# Altium PCB pedal_pcb.PcbDoc
Units mil, origin at the board's own origin, x right, y up, seen from the top; angles counter-clockwise.
Board outline 6000 x 4000 mil, 2 copper layers (Top Layer, Bottom Layer); 23 components, 18 nets, 75 pads, 0 vias.
Unrouted connection lines stored in the file: 54.
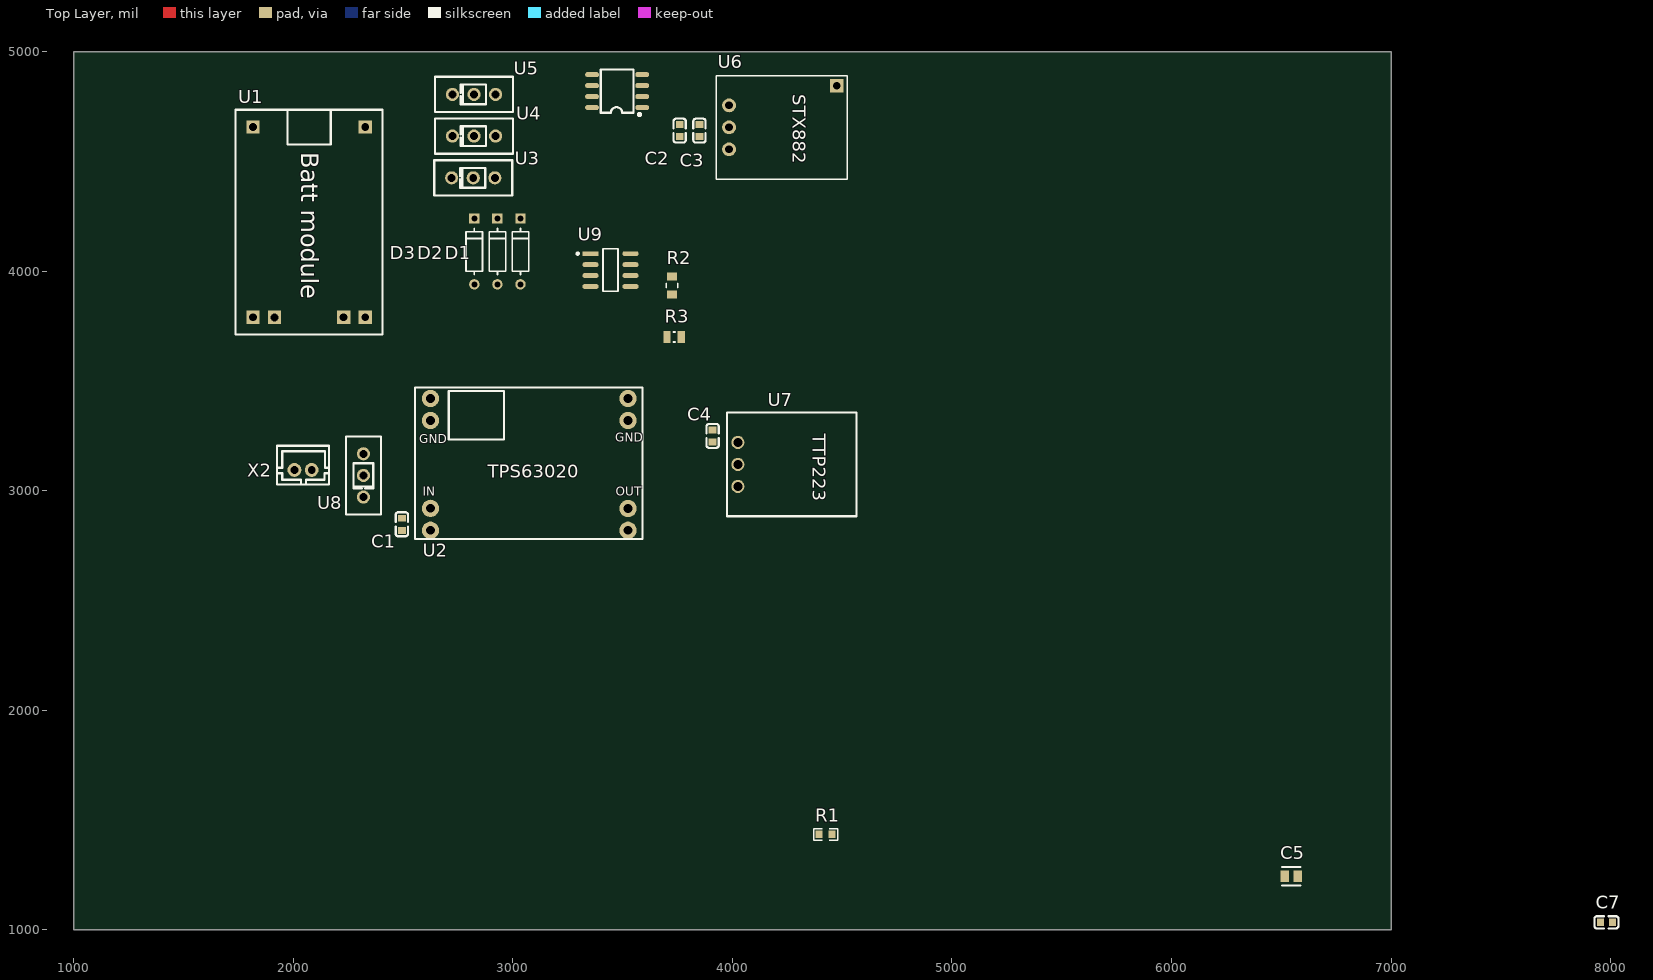
[diagram p0: Top Layer view]
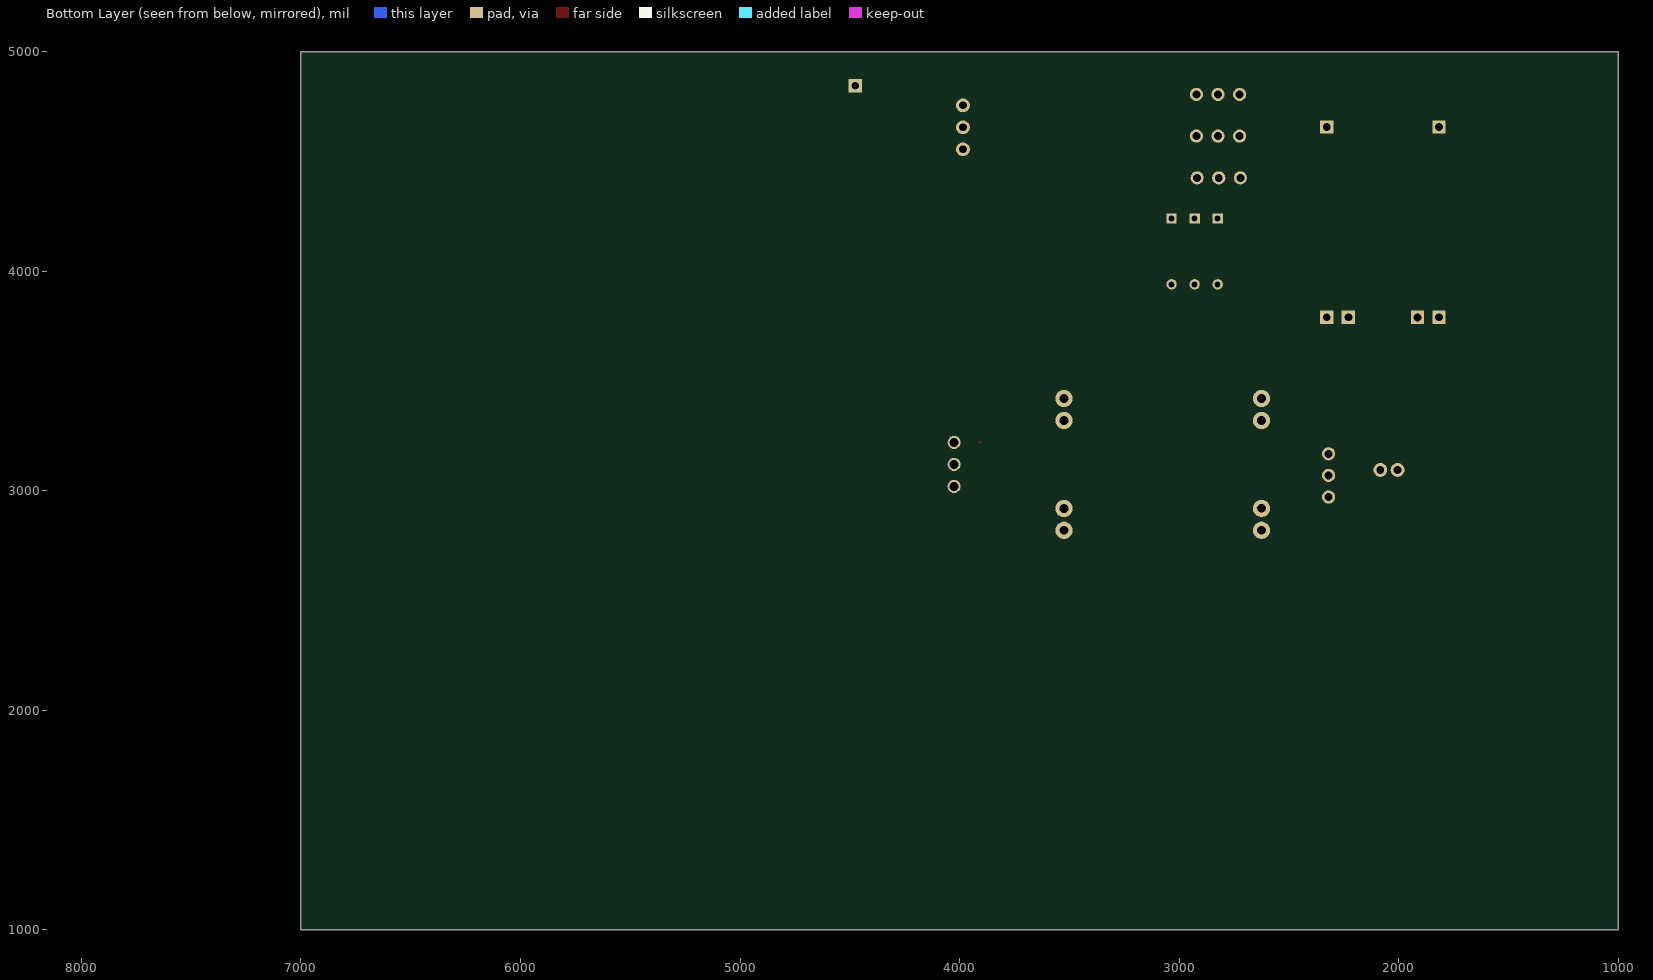
[diagram p1: Bottom Layer view, seen from below]

## Layer stack, top to bottom
Top Solder: solder mask 0.4, Solder Resist, Dk 3.5
Top Layer: signal copper 1.4
Dielectric 1: dielectric 12.6, FR-4, Dk 4.8
Bottom Layer: signal copper 1.4
Bottom Solder: solder mask 0.4, Solder Resist, Dk 3.5

## Board outline
1000,1000 7000,1000 7000,5000 1000,5000

## Design rules (kind name [scope] priority, off if disabled: settings)
Clearance [All] p1: gap=10 ignorepadtopadclearanceinfootprint=FALSE
PolygonConnect [All] p1: connectstyle=Relief reliefconductorwidth=10 reliefentries=4 polygonreliefangle="90 Angle" airgapwidth=10
RoutingVias [All] p1: holewidth=28 width=50 viastyle="Through Hole" minholewidth=28 minwidth=50 maxholewidth=28 maxwidth=50
SolderMaskExpansion [All] p1: expansion=0 istentingtop=FALSE
SupplyNets "Schematic Supply Nets_1" [InNet('GND')] p1: voltage=0.000
SupplyNets "Schematic Supply Nets" [InNet('VCC')] p2: voltage=0.000
Width [All] p1: maxlimit=10 minlimit=10 preferedwidth=10
30 further rules are at their usual default settings.

## Classes and differential pairs
component class dropout_timer: C5 C7 R2 R3 U9

## Components (designator, comment, footprint, x,y, rotation, side; value= is the part's Value field where it differs from the comment)
C1 "10uF" C0603 2495,2847.4 r270 top
C2 "10uF" C0603 3760,4640 r270 top
C3 "100nF" C0603 3850,4640 r270 top
C4 "100nF" C0603 3910,3250 r90 top
C5 "C0805C103K5RACTU" FP-C0805C-DN-MFG 6544.53,1245 r0 top value="10,000 pF"
C7 "10uF" C0603 7980,1035 r0 top
D1 "1N4148" FP-017AG-MFG 3035,4090 r270 top
D2 "1N4148" FP-017AG-MFG 2930,4090 r270 top
D3 "1N4148" FP-017AG-MFG 2825,4090 r270 top
R1 "330k" R0603 4425,1435 r0 top
R2 "AC0805FR-0747RL" FP-AC0805-MFG 3725,3935 r90 top value=47Ω
R3 "CRCW080510K0JNTA" RESC2013X50X30LL20T20 3735,3700 r180 top
U1 "TP4056" BATTMODULE 1737.9,4734.9 r270 top
U2 "TPS63020 Module1" "TPS63020 MODULE AIOT" 2555,3470 r0 top
U3 "SS-12D00-G3" SW-TH_3P-L8.8-W3.9-P2.50_SS12D00G3 2820,4425 r0 top
U4 "SS-12D00-G3" SW-TH_3P-L8.8-W3.9-P2.50_SS12D00G3 2823.4,4615 r0 top
U5 "SS-12D00-G3" SW-TH_3P-L8.8-W3.9-P2.50_SS12D00G3 2823.4,4805 r0 top
U6 "STX882-433" STX882_NiceRF_12x15.2 4225,4655 r270 top
U7 "TTP223" TTP223 4290,3120 r270 top
U8 "SS-12D00-G3" SW-TH_3P-L8.8-W3.9-P2.50_SS12D00G3 2320,3070 r90 top
U9 "TLC555QDR" FP-D0008A-IPC_C 3445,4005 r0 top
X2 "B2B-PH-K-S" CONN-TH_B2B-PH-K-S 2045,3095 r0 top
? "EV1527" SOP-8_L4.9-W3.9-P1.27-LS6.0-TL 3475,4820 r180 top

## Footprints (in the part's own frame and the unit in brackets; to place one, negate y for a bottom-side part, rotate by r counter-clockwise, add the part's x,y. Pads: shape width x height; smd on the part's side, far side on the other; paste and mask are expansions set on the pad)
BATTMODULE [mil]
  rect 60x60 hole 36 paste-99999 mask+4: 1(78.8,590.5) 2(78.8,78.7) 3(944.9,590.5) 4(944.9,492.1) 5(945,177.1) 6(944.9,78.7)
  silkscreen extent 0,0 1024,669
C0603 [mil]
  rect 31.5x35.4 smd: 1(-27.6,0) 2(27.5,0)
  silkscreen extent -55,-28 55,28
CONN-TH_B2B-PH-K-S [mil]
  round 63 hole 35.4: 1(39.4,0) 2(-39.4,0)
  silkscreen extent -118,-67 118,110
FP-017AG-MFG [mm]
  rect 1.2x1.2 hole 0.7 paste-2539.97 mask+0: 1(-3.813,0)
  round 1.2 hole 0.7 paste-2539.97 mask+0: 2(3.813,0)
  silkscreen extent -2.68,-0.95 2.68,0.95, body extent -4.51,-1.05 4.51,1.05, height 0.25
FP-AC0805-MFG [mm]
  rect 0.9x1.2 smd paste+0 mask+0: 1(-1.05,0) 2(1.05,0)
  silkscreen extent -0.23,-0.67 0.23,0.67, body extent -1.6,-0.77 1.6,0.77, height 0.25
FP-C0805C-DN-MFG [mm]
  rect 0.95x1.35 smd paste+0 mask+0: 1(-0.75,0) 2(0.75,0)
  silkscreen extent -1.1,-1.07 1.1,1.07, body extent -1.4,-0.85 1.4,0.85, height 0.25
FP-D0008A-IPC_C [mil]
  rect 73.59x21.34 smd paste+0 mask+0: 1(-91.09,75)
  rrect100% 73.59x21.34 smd paste+0 mask+0: 2(-91.09,25) 3(-91.09,-25) 4(-91.09,-75) 5(91.09,-75) 6(91.09,-25) 7(91.09,25) 8(91.09,75)
  silkscreen extent -154,-97 35,97, body extent -132,-100 132,100, height 10
R0603 [mil]
  rect 31.8x34 smd paste-3937 mask+2: 1(-29.6,0) 2(29.7,0)
  silkscreen extent -54,-26 54,26
RESC2013X50X30LL20T20 [mm] "Chip Resistor, 2-Leads, Body 2.00x1.25mm, IPC High Density"
  rect 0.85x1.35 smd: 1(-0.825,0) 2(0.825,0)
  silkscreen extent -0.1,-0.58 0.1,0.58, body extent -1.1,-0.72 1.1,0.72, height 0.5
SOP-8_L4.9-W3.9-P1.27-LS6.0-TL [mil]
  oval 63x23.6 smd: 1(-114.2,75) 2(-114.2,25) 3(-114.2,-25) 4(-114.2,-75) 5(114.2,-75) 6(114.2,-25) 7(114.2,25) 8(114.2,75)
  silkscreen extent -108,-98 75,112
STX882_NiceRF_12x15.2 [mil]
  rect 63x63 hole 35: 1(-189,250)
  round 63 hole 35: 2(-100,-240) 3(0,-240) 4(100,-240)
  silkscreen extent -236,-299 236,299
SW-TH_3P-L8.8-W3.9-P2.50_SS12D00G3 [mil]
  round 60 hole 36 paste-99999 mask+2: 1(-98.4,0) 2(0,0) 3(98.4,0)
  silkscreen extent -178,-80 178,80
"TPS63020 MODULE AIOT" [mil]
  round 78.7 hole 39.4: 1(70,-150) 1(70,-50) 2(70,-650) 2(70,-550) 3(970,-150) 3(970,-50) 4(970,-650) 4(970,-551)
  silkscreen extent 0,-689 1036,0
TTP223 [mil]
  round 60 hole 40.2: 1(-100,-265) 2(0,-265) 3(100,-265)
  silkscreen extent -236,-315 236,276

## Part data
C1 C2 C7: library part CAP_0603, AddInBom=yes, ConvertToPcb=yes, Device=CAP_0603, FootprintName=C0603, ModelId=624118aa3cc7497086c383c2d72e0852ÂŽ0819f05c4eef4c71ace90d822a990e87, ModelName=C0603_L1.6-W0.8-H0.8, ModelTransform=62.992,31.496,0,0,0,0,0,0,0, Supplier Footprint=0603, Symbol=CAP_OLD
C3 C4: library part CAP_0603_1, AddInBom=yes, ConvertToPcb=yes, Device=CAP_0603, FootprintName=C0603, ModelId=624118aa3cc7497086c383c2d72e0852ÂŽ0819f05c4eef4c71ace90d822a990e87, ModelName=C0603_L1.6-W0.8-H0.8, ModelTransform=62.992,31.496,0,0,0,0,0,0,0, Supplier Footprint=0603, Symbol=CAP_OLD
C5: library part CMP-2007-01079-2, "CAP CER 10000PF 50V X7R 0805", Capacitance="10,000 pF", Manufacturer=KEMET, Package=C0805C-DN, Temperature="-55°C to +125°C", Temperature Characteristic=X7R, Temperature Coefficient=30ppm/°C, Temperature Range High=+125°C, Temperature Range Low=-55°C, Tolerance=0.1, Voltage Rating="50 V", Automotive=No, Category=Cap, ComponentLink2Description=Datasheet, ComponentLink2URL=https://content.kemet.com/datasheets/KEM_C1003_C0G_SMD.pdf, Device Class L1="Passive Components", Device Class L2=Capacitors, Device Class L3="Ceramic Capacitors", Digikey Description="CAP CER 10000PF 50V X7R 0805", Height=0.88mm, Ipc Land Pattern Name=CAPC200125X78, Lead Free=Yes, Manufacturer Part Number=C0805C103K5RACTU, Material=Ceramic, Octopart=https://octopart.com/c0805c103k5ractu-kemet-90536, RoHS=TRUE
D1 D2 D3: library part CMP-07163-000046-1, "DIODE GEN PURP 100V 200MA DO35", Average Rectified Current=200mA, Capacitance=4pF, Case/Package=DO-35, Current=4A, Forward Current=300mA, Forward Voltage=1V, Max Forward Surge Current (Ifsm)=1A, Max Operating Temperature=175°C, Max Power Dissipation=500mW, Max Repetitive Reverse Voltage (Vrrm)=100V, Max Reverse Current=5uA, Min Operating Temperature=-65°C, Package Quantity=2000, Contact Plating=Tin, Current Rating=200mA, Diameter=1.91mm, Element Configuration=Single, Height=4.56mm, Lead Free="Lead Free", Length=4.56mm, Max Reverse Voltage (DC)=100V, Max Surge Current=4A, Mount="Through Hole", Number of Pins=2, Output Current=200mA, Outside Diameter=1.85mm, Packaging=Bulk, Peak Non-Repetitive Surge Current=4A, Polarity=Standard, Power Dissipation=500mW, Radiation Hardening=No, REACH SVHC="No SVHC", Recovery Time=4ns, Reverse Recovery Time=4ns, Reverse Voltage=100V, Series=-, Voltage=100V, Voltage Rating (DC)=100V, Weight=0.01lb, Width=1.91mm
R1: library part Res_0603, AddInBom=yes, ConvertToPcb=yes, Device=Res_0603, FootprintName=R0603, ModelId=112863783b5b41f1b5254f87eedc7932ÂŽ0819f05c4eef4c71ace90d822a990e87, ModelName=R0603, ModelTransform=31.8897,63.7794,0,90,0,0,0,0,0, Supplier Footprint=0603, Symbol=Res
R2: library part CMP-03412-037772-1, "RES SMD 47 OHM 1% 1/8W 0805", Manufacturer=Yageo, Package=AC0805, Power Rating=1/8W, Resistance=47Ω, Temperature="-55°C to +155°C", Temperature Range High=+155°C, Temperature Range Low=-55°C, Tolerance=0.01, Voltage Rating=150V, Automotive=Yes, Automotive Grade="Grade 0", Category=Res, ComponentLink2Description=Datasheet, ComponentLink2URL=http://www.yageo.com/documents/recent/PYu-AC_51_RoHS_L_6.pdf, Composition="Thick Film", Device Class L1="Passive Components", Device Class L2=Resistors, Device Class L3="Chip SMD Resistors", Digikey Description="RES SMD 47 OHM 1% 1/8W 0805", Footprint Url=http://www.yageo.com/exep/pages/download/literatures/PYu-R_Mount_10.pdf, Height=0.6mm, Ipc Land Pattern Name=RESC200125X50, Lead Free=Yes, Manufacturer Part Number=AC0805FR-0747RL, Mouser Description="Thick Film Resistors - SMD 1/8W 47ohm 1% AEC-Q200", Octopart=https://octopart.com/ac0805fr-0747rl-yageo-46503502, RoHS=TRUE, Series=AC
R3: library part CMP-2001-04257-1, Manufacturer="Vishay Dale", Part Number=CRCW080510K0JNTA
U1: ManufacturerPart="TP4056 Lithium Battery Charger Module", AddInBom=yes, ConvertToPcb=yes, Device=TP4056, FootprintName=BATTMODULE, ModelId=e423d71e48284fa8aca64bd540eddcc7ÂŽ12eb6a14b26044868d603fa342c20fc9, ModelName=TP4056, ModelTransform=1123.969599391241,677.16402,166.0550894347883,0,0,0,519.68504,330.70866,0, Symbol=TP4056
U2: library part TPS63020, "TPS63020 (Buck-Boost)", AddInBom=yes, ConvertToPcb=yes, Device=TPS63020, FootprintName="TPS63020 MODULE AIOT", Symbol=TPS63020
U3 U4 U5 U8: "Circuit:SPDT Actuator Style:Rectangular Columnar Termination Style:PC Pin Length:8.8mm Width:3.9mm Switch Height:7.2mm Mounting Type:Through Hole Actuator Color:Black Operating Temperature:-35℃~+75℃ Operating Temperature:-35℃~+75℃", Actuator Color=Black, JLCPCB Part Class="Extended Part", LCSC Part Name=大型拨动开关, Manufacturer=SOFNG(硕方), Operating Temperature=-35℃~+75℃, Actuator Style="Rectangular Columnar", AddInBom=yes, Circuit=SPDT, ConvertToPcb=yes, Datasheet=https://item.szlcsc.com/datasheet/SS-12D00-G3/23787622.html, Device=SS-12D00-G3, FootprintName=SW-TH_3P-L8.8-W3.9-P2.50_SS12D00G3, Length=8.8mm, ManufacturerPart=SS-12D00-G3, ModelId=73abde54055d465790e8480c42fb2657ÂŽ0819f05c4eef4c71ace90d822a990e87, ModelName=SW-TH_3P-L8.8-W3.9-P2.50_SS12D00G3, ModelTransform=346.495,153.54304,0,0,0,0,0,0,-102.362, Mounting Type="Through Hole", Supplier=LCSC, Supplier Footprint=插件-3P,8.8x3.9mm, SupplierPart=C22355741, Switch Height=7.2mm, Symbol=SS-12D00-G3, Termination Style="PC Pin", Width=3.9mm
U6: "NiceRF STX882 433.92MHz ASK/OOK transmitter, 12.00x15.20mm, 3x2.54mm header + corner ANT pad", AddInBom=yes, ConvertToPcb=yes, Device=STX882-433, FootprintName=STX882_NiceRF_12x15.2, ModelTransform="0, 0, 0, 0, 0, 0, 0, 0, 0", Symbol=STX882_NiceRF
U9: library part CMP-04858-000019-1, "IC OSC SGL TIMER 2.1MHZ 8-SOIC", Case/Package=SOIC, Frequency=2.1MHz, High Level Output Current=-10mA, Low Level Output Current=100mA, Max Operating Temperature=125°C, Max Power Dissipation=725mW, Max Supply Voltage=15V, Min Operating Temperature=-40°C, Min Supply Voltage=5V, Nominal Supply Current=250uA, Operating Supply Current=360uA, Package Quantity=2500, Contact Plating=Gold, Height=1.58mm, Lead Free="Lead Free", Length=4.9mm, Mount="Surface Mount", Number of Pins=8, Number of Timers/Counters=1, Packaging="Tape and Reel", Power Dissipation=725mW, Quiescent Current=250uA, Radiation Hardening=No, REACH SVHC="No SVHC", RoHS Compliant=Yes, Weight=0.002677oz, Width=3.91mm
X2: "Pins Structure:1x2P Pitch:2mm Mounting Style:Direct Insert Reference Series:PH Number of Pins:2P Number of Rows:1 Number of PINs Per Row:2 Row Spacing:- Current Rating (Max):2A Contact Material:Brass Contact Plating:Tin Operating Temperature Range:-25℃~+8", Colour=White, Current Rating (Max)=2A, Flame Retardant Rating=UL94V-0, JLCPCB Part Class="Extended Part", LCSC Part Name="1x2P 间距:2mm 直插 系列:PH", Manufacturer=JST, Operating Temperature Range=-25℃~+85℃, Rated Voltage (Max)=100V, AddInBom=yes, Contact Material=Brass, Contact Plating=Tin, ConvertToPcb=yes, Datasheet=https://atta.szlcsc.com/upload/public/pdf/source/20181010/C265101_22107ACC4D8714694FDA2DD97145FA81.pdf, Device=B2B-PH-K-S, FootprintName=CONN-TH_B2B-PH-K-S, ManufacturerPart=B2B-PH-K-S, ModelId=5cc63648eb1041ff813a836ee0942c91ÂŽ0819f05c4eef4c71ace90d822a990e87, ModelName=CONN-TH_PH2.00-LI-2P, ModelTransform=236.25937,181.102,0,180,0,0,0,23.622,-137.795, Mounting Style="Direct Insert", Number of Pins=2P, Number of PINs Per Row=2, Number of Rows=1, Pins Structure=1x2P, Pitch=2mm, Plastic Material=PA66, Reference Series=PH, Row Spacing=-, Supplementary Features="K-leg punch", Supplier=LCSC, Supplier Footprint=插件,P=2mm, SupplierPart=C20504437, Symbol=B2B-PH-K-S, X-Length of Bottom Edge on Board (Spacing Line)=5.9mm, Y-Width of Bottom Edge on Board=4.5mm, Z-Height of the Board=6mm
?: JLCPCB Part Class="Extended Part", AddInBom=yes, ConvertToPcb=yes, Device=EV1527, FootprintName=SOP-8_L4.9-W3.9-P1.27-LS6.0-TL, LCSC Part Name=EV1527, ManufacturerPart=EV1527, ModelId=1637369e3845406d90068fbde42645d6ÂŽ0819f05c4eef4c71ace90d822a990e87, ModelName=SOP-8_L4.9-W3.9-H1.45-LS6.0-P1.27, ModelTransform=236.22,189.751,0,0,0,0,-0.005,0.003,0, Supplier=LCSC, Supplier Footprint=SOP-8, SupplierPart=C2764439, Symbol=EV1527_C2764439
U7: AddInBom=yes, ConvertToPcb=yes, Device=TTP223, FootprintName=TTP223, ModelId=d48ae1b8fed1494d82694b8c5cf2b6f8ÂŽ0819f05c4eef4c71ace90d822a990e87, ModelName=COMM-TH_L15.0-W11.0_TTP223, ModelTransform=590.54,433.06,295.27,90,0,0,0,0,0, Symbol=TTP223

## Nets (pads, with @x,y where several pads share a name; then routed paths per layer and width w, separated by ;. In a path a pad name is that pad's centre, name@x,y a point inside that pad or via, vN(x,y) a via of type N, cw(c..) or ccw(c..) an arc to the next point about the centre after c; other vN are vias at no path point)
ENC_K1: ?.6 U3.2
ENC_K2: ?.7 U4.2
ENC_K3: ?.8 U5.2
GND: ?.3 C1.2 C2.2 C3.2 C4.2 C5.2 C7.2 U1.6 U2.1 U2.3 U3.3 U4.3 U5.3 U6.4 U7.3 U8.1 U9.1
Net_1: ?.1 R1.2
Net_4: ?.4 U6.2
Net_5: ?.5 D1.2 D2.2 D3.2 U9.3
NetC5_1: C5.1 U9.5
NetD1_1: D1.1 U3.1
NetD2_1: D2.1 U4.1
NetD3_1: D3.1 U5.1
NetU1_3: U1.3 U8.3
NetU1_4: U1.4 X2.1
NetU1_5: U1.5 X2.2
REG_VIN: C1.1 U2.2 U8.2
TIMER_VIN: R3.1 U7.2 U9.2 | length 12.2
  Top Layer w10: U7.2 U7.2@4033.64,3128.64
V_CONT: C7.1 R2.1 U9.6 U9.7
VCC: ?.2 C2.1 C3.1 C4.1 R1.1 R2.2 R3.2 U2.4 U6.3 U7.1 U9.4 U9.8 | length 3.4
  Top Layer w10: C4.1@3908.05,3222.4 C4.1@3910.45,3220
pads on no net: U1.1 U1.2 U6.1

## Text inside footprints (layer, text, board x,y; h text height)
U1: Top Overlay "Batt module" at 2035.9,4541.9 h80 r270
U2: Top Overlay "TPS63020" at 2885,3060 h60; Top Overlay "IN" at 2590,2978 h39.4; Top Overlay "OUT" at 3469,2978 h39.4; Top Overlay "GND" at 2575,3217 h39.4; Top Overlay "GND" at 3467,3224 h39.4
U6: Top Overlay "STX882" at 4275,4805 h60 r270